# Altium PCB wifi_lamp_01.PcbDoc
Units mm, origin at the board's own origin, x right, y up, seen from the top; angles counter-clockwise.
Board outline 80 x 80 mm, 2 copper layers (Top Layer, Bottom Layer); 45 components, 34 nets, 135 pads, 11 vias.
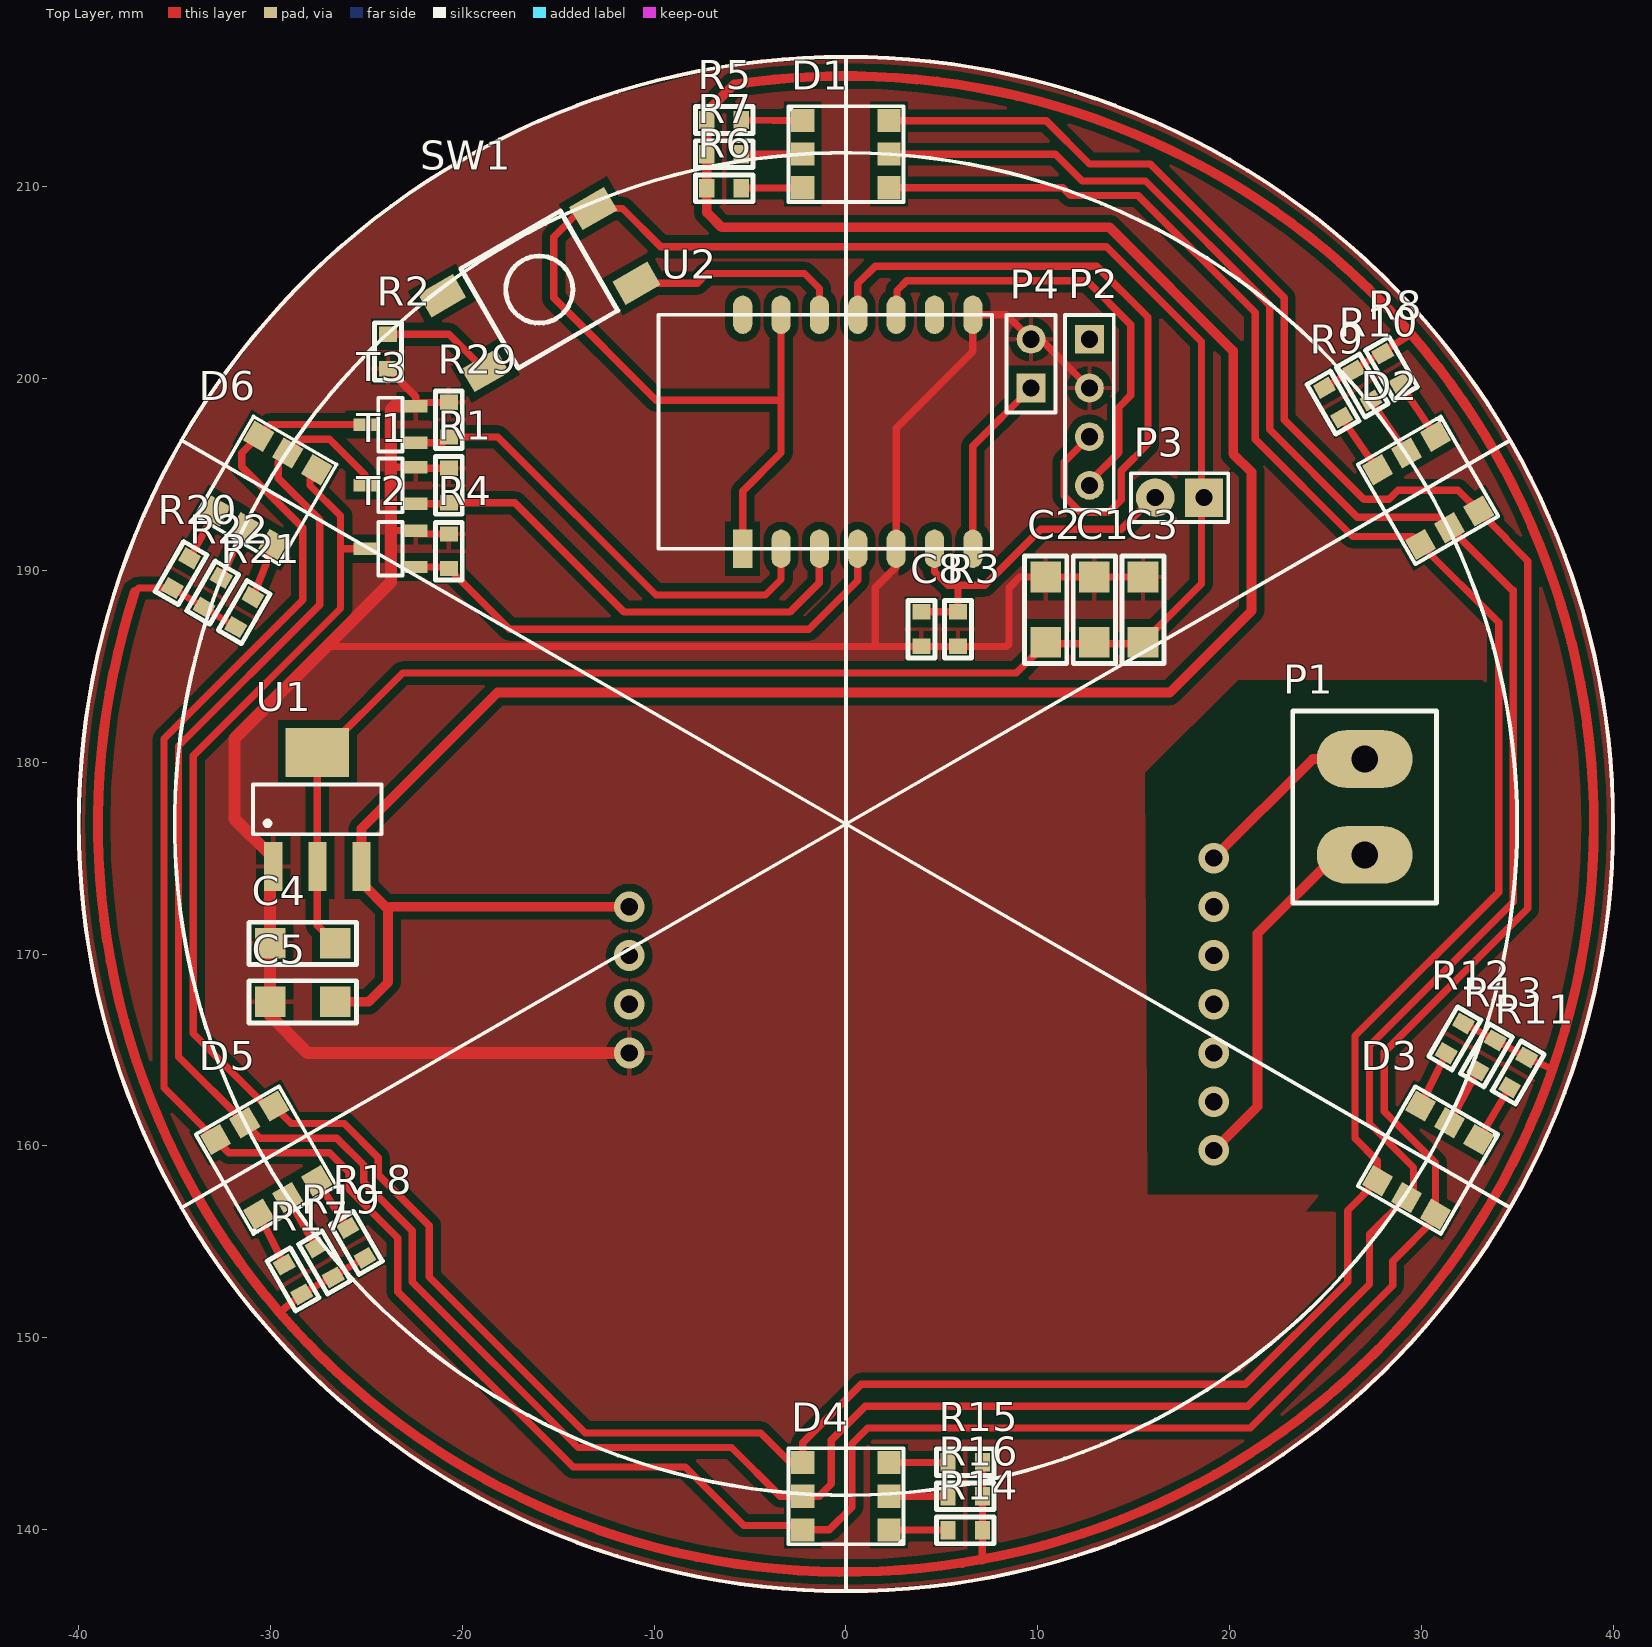
[diagram p0: Top Layer view]
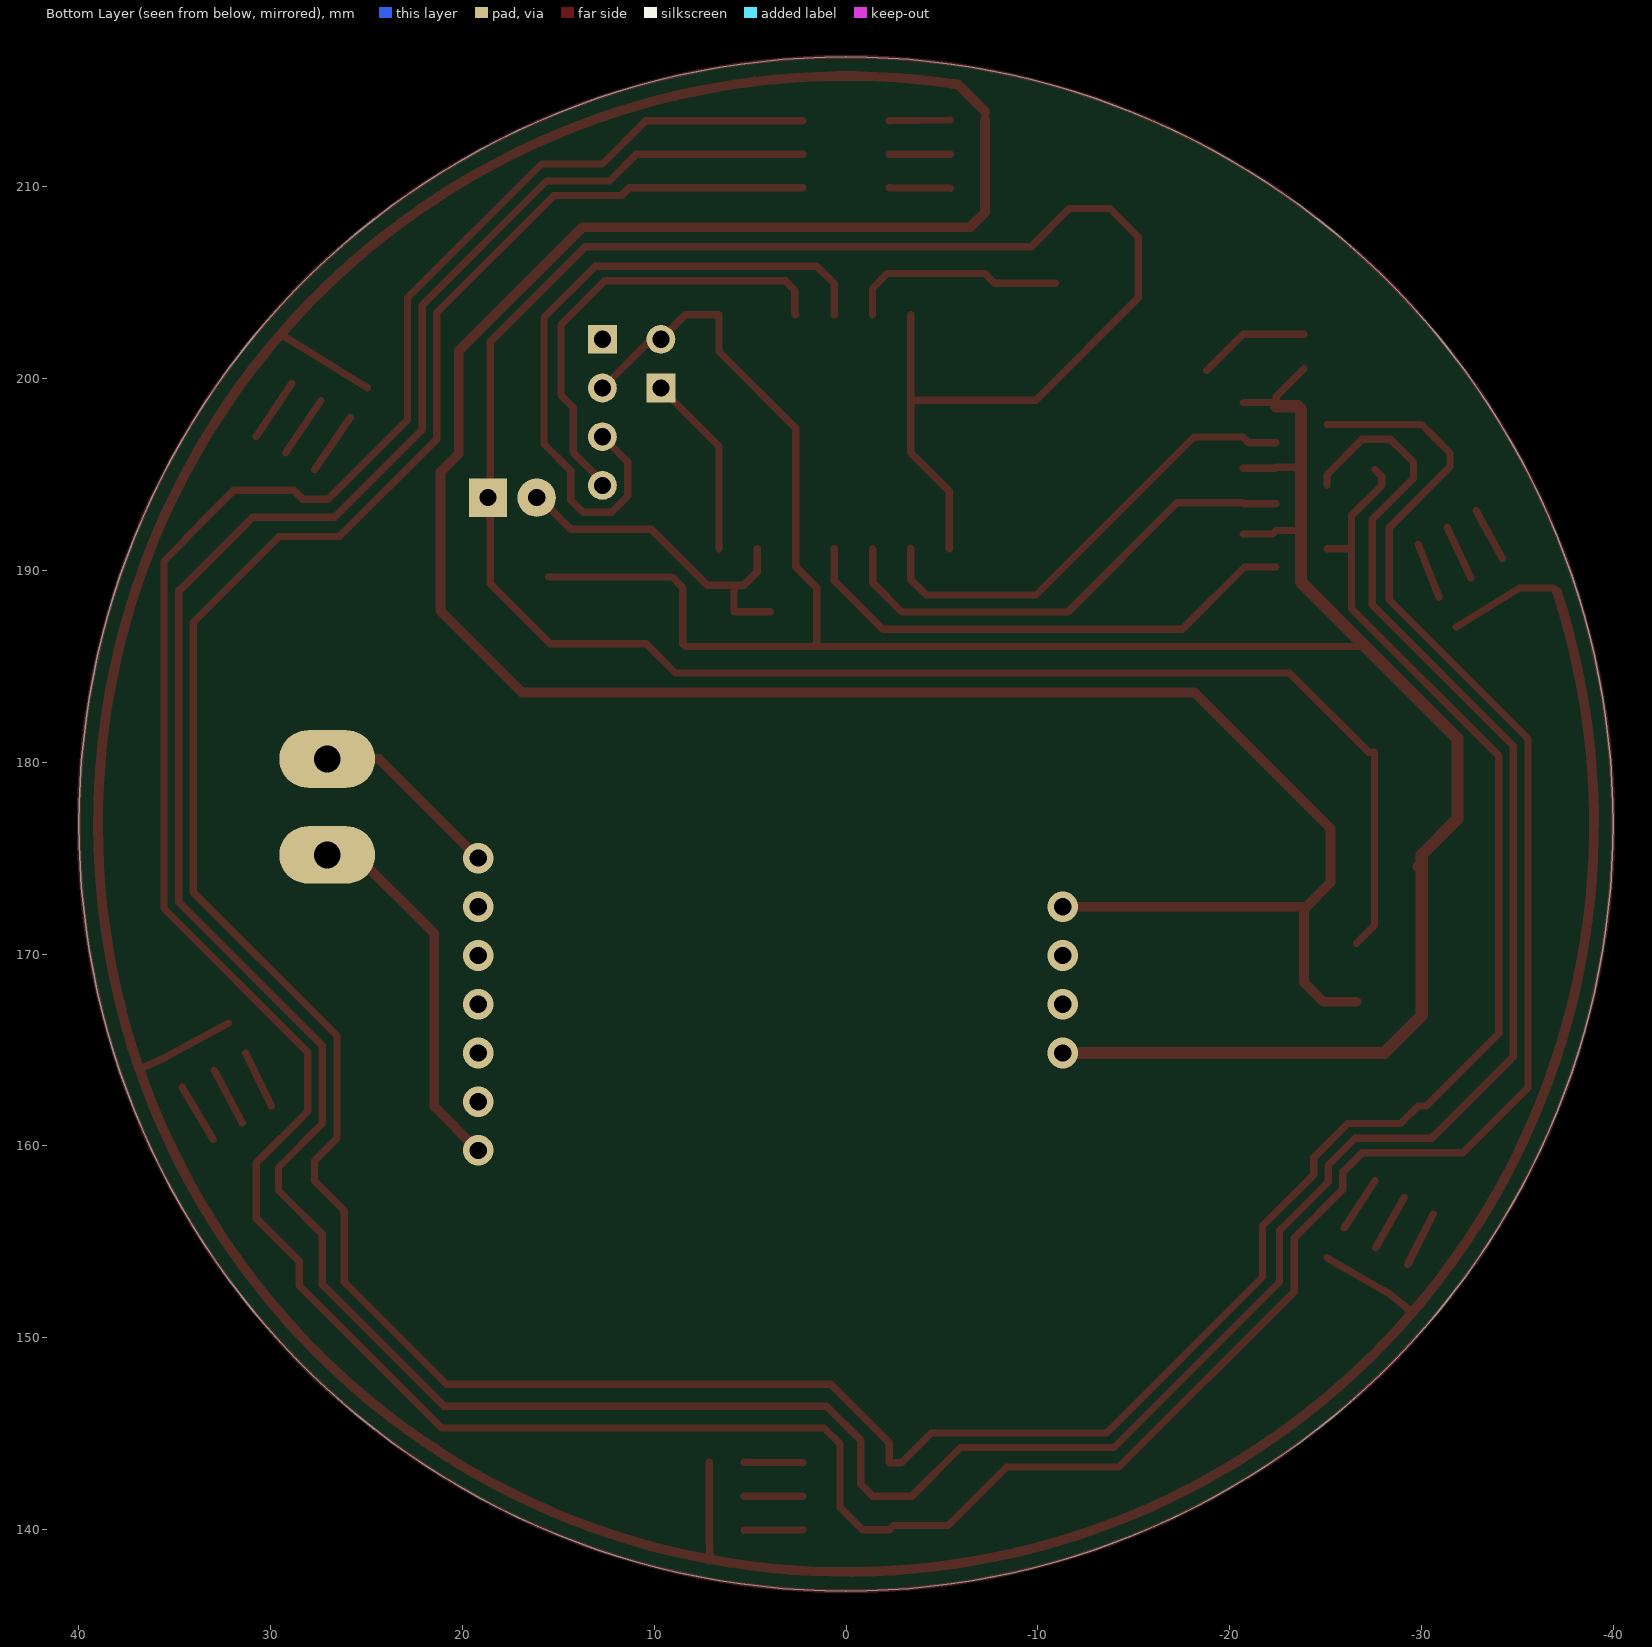
[diagram p1: Bottom Layer view, seen from below]
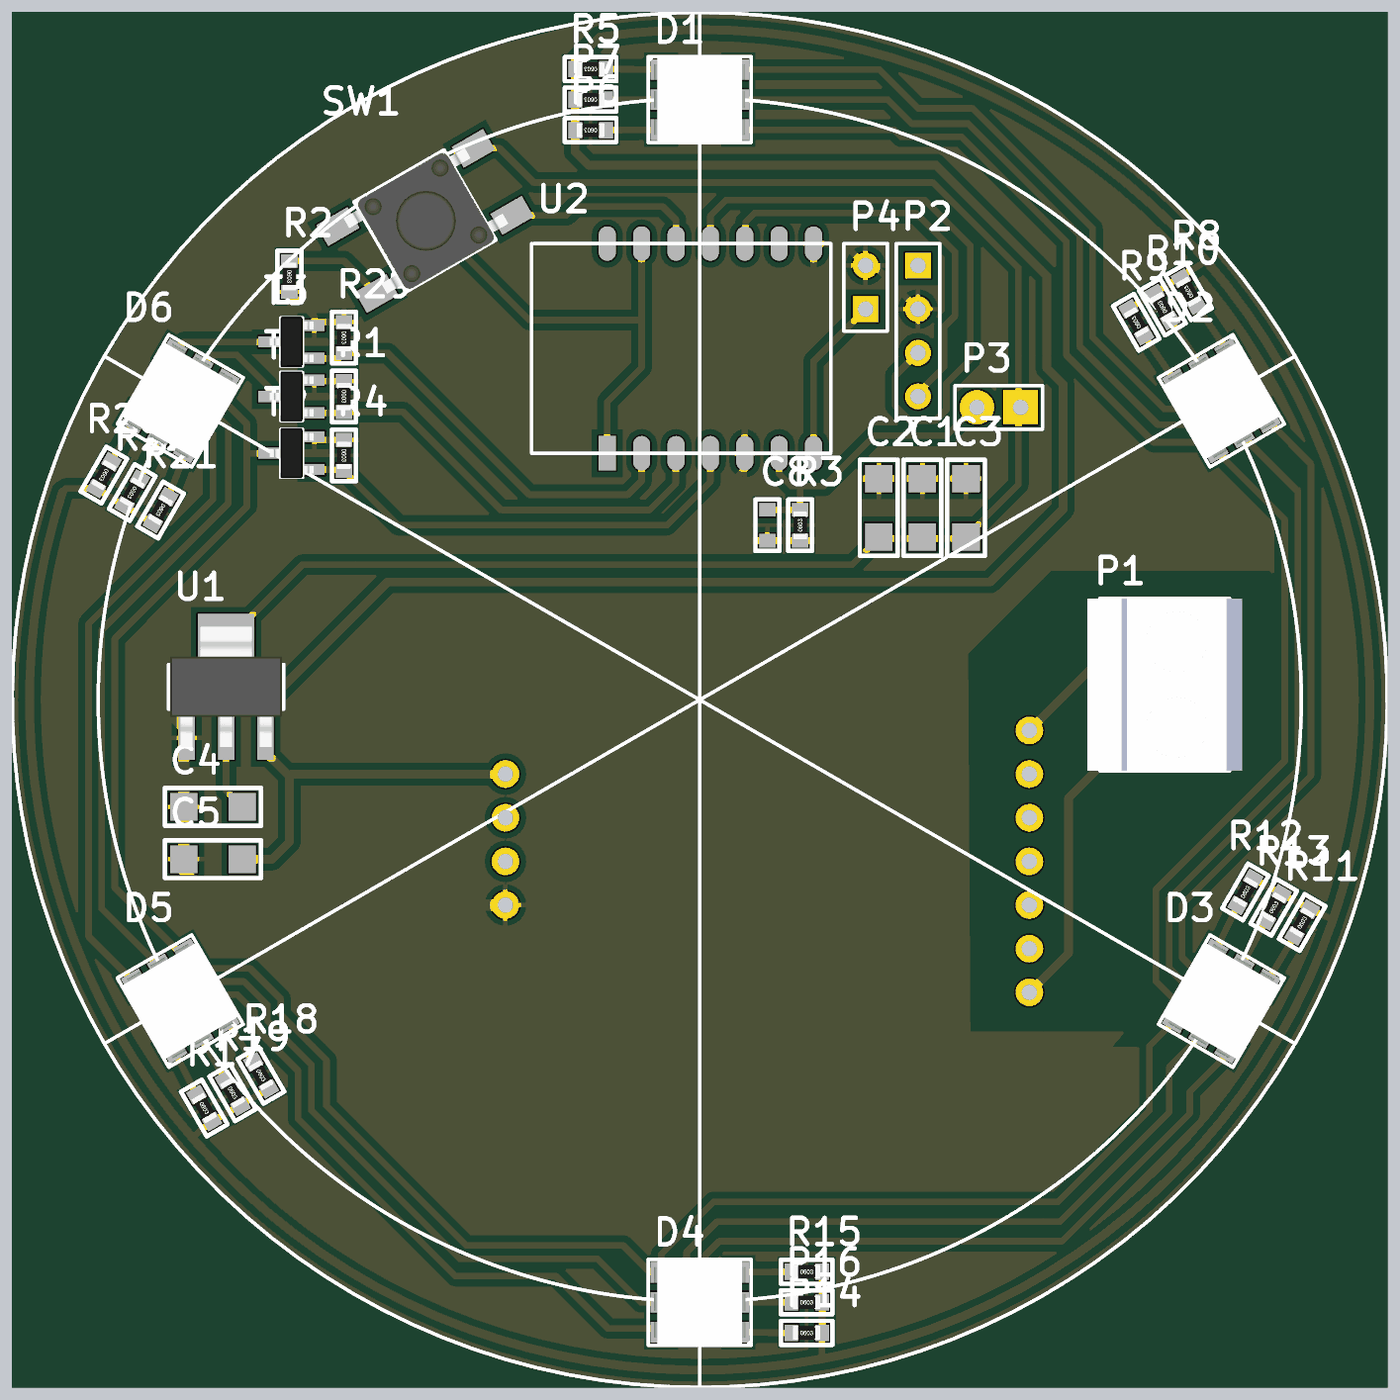
[diagram p2: 3D render of the assembled board from above, using the file's embedded part models]

## Layer stack, top to bottom
Top Layer: signal copper 0.0356
Dielectric: dielectric 0.32, FR-4, Dk 4.8
Bottom Layer: signal copper 0.0356

## Board outline
-34.641,156.784 ccw(c0,176.784) 0,136.784 ccw(c0,176.784) 34.641,156.784 ccw(c0,176.784) 34.641,196.784 ccw(c0,176.784) 0,216.784 ccw(c0,176.784) -34.641,196.784 ccw(c0,176.784)

## Design rules (kind name [scope] priority, off if disabled: settings)
Clearance Clearance_to_poly [All vs (InNamedPolygon('TOP GND'))] p1: gap=0.4
Clearance [All] p2: gap=0.381
PolygonConnect [All] p1: connectstyle=Relief reliefconductorwidth=0.254 reliefentries=4 polygonreliefangle="90 Angle"
RoutingVias [All] p1: holewidth=0.711 width=1.27 viastyle="Through Hole" minholewidth=0.711 minwidth=1.27 maxholewidth=0.711 maxwidth=1.27
SilkscreenOverComponentPads [All] p1: minsilkscreentomaskgap=0.254
SolderMaskExpansion [All] p1: expansion=0.102
Width [All] p1: maxlimit=0.762 minlimit=0.254 preferedwidth=0.254
27 further rules are at their usual default settings.

## Components (designator, comment, footprint, x,y, rotation, side; value= is the part's Value field where it differs from the comment)
C1 "10uF" FP_1206_CAP_085 12.954,187.96 r270 top
C2 "10uF" FP_1206_CAP_085 10.414,187.96 r270 top
C3 "10uF" FP_1206_CAP_085 15.494,187.96 r270 top
C4 "10uF" FP_1206_CAP_085 -28.321,170.561 r0 top
C5 "10uF" FP_1206_CAP_085 -28.321,167.513 r180 top
C8 "100nF" FP_0603_CAP_080 3.937,186.944 r270 top
D1 "RGB" RGB_LED_5.0x5.0mm 0,211.709 r270 top
D2 "RGB" RGB_LED_5.0x5.0mm 30.353,194.183 r210 top
D3 "RGB" RGB_LED_5.0x5.0mm 30.353,159.258 r150 top
D4 "RGB" RGB_LED_5.0x5.0mm 0,141.732 r90 top
D5 "RGB" RGB_LED_5.0x5.0mm -30.226,159.258 r30 top
D6 "RGB" RGB_LED_5.0x5.0mm -30.226,194.183 r330 top
P1 "AC" "Sorkapocs 2P 5mm" 27.051,177.673 r270 top
P2 "PROG" HDR1X4 12.7,202.057 r270 top
P3 "BUTTON" HDR1X2#1 18.669,193.802 r180 top
P4 "BUTTON" HDR1X2#2 9.652,199.517 r90 top
R1 "100K" FP_0603_RES -20.701,194.437 r270 top
R2 "100K" FP_0603_RES -23.876,201.422 r270 top
R3 "100K" FP_0603_RES 5.842,186.944 r90 top
R4 "100K" FP_0603_RES -20.701,191.008 r270 top
R5 "560R" FP_0603_RES -6.35,213.487 r180 top
R6 "560R" FP_0603_RES -6.35,209.931 r180 top
R7 "560R" FP_0603_RES -6.35,211.709 r180 top
R8 "560R" FP_0603_RES 28.448,200.533 r120 top
R9 "560R" FP_0603_RES 25.4,198.755 r120 top
R10 "560R" FP_0603_RES 26.924,199.644 r120 top
R11 "560R" FP_0603_RES 35.052,163.83 r60 top
R12 "560R" FP_0603_RES 31.75,165.608 r60 top
R13 "560R" FP_0603_RES 33.401,164.719 r60 top
R14 "560R" FP_0603_RES 6.223,139.954 r0 top
R15 "560R" FP_0603_RES 6.223,143.51 r0 top
R16 "560R" FP_0603_RES 6.223,141.732 r0 top
R17 "560R" FP_0603_RES -28.829,153.035 r300 top
R18 "560R" FP_0603_RES -25.527,154.94 r300 top
R19 "560R" FP_0603_RES -27.178,153.924 r300 top
R20 "560R" FP_0603_RES -34.671,189.865 r240 top
R21 "560R" FP_0603_RES -31.369,187.833 r240 top
R22 "560R" FP_0603_RES -33.02,188.849 r240 top
R29 "100K" FP_0603_RES -20.701,197.866 r270 top
SW1 "SW_ tactile" FP_TACTBTN -10.922,204.978 r300 top
T1 "SI2306" FET_SOT23 -23.749,194.437 r0 top
T2 "SI2306" FET_SOT23 -23.749,191.135 r0 top
T3 "SI2306" FET_SOT23 -23.749,197.612 r0 top
U1 "LD1117xx" SUPPLY_SOT223 -27.559,177.546 r90 top
U2 "ESP-3" ESP_3 7.62,191.135 r90 top

## Footprints (in the part's own frame and the unit in brackets; to place one, negate y for a bottom-side part, rotate by r counter-clockwise, add the part's x,y. Pads: shape width x height; smd on the part's side, far side on the other; paste and mask are expansions set on the pad)
ESP_3 [mm]
  rect 2x1 smd: 1(0,13)
  oval 2x1 smd: 2(0,11) 3(0,9) 4(0,7) 5(0,5) 6(0,3) 7(0,1) 8(12.2,1) 9(12.2,3) 10(12.2,5) 11(12.2,7) 12(12.2,9) 13(12.2,11) 14(12.2,13)
  silkscreen extent 0,0 12.2,17.4, body extent 0,0 12.2,17.4, height 2
FET_SOT23 [mm] "SOT23-3 tok"
  rect 1.2x0.65 smd: D(-1.327,0) G(1.327,-0.95) S(1.327,0.95)
  silkscreen extent -0.64,-1.4 0.64,1.4, body extent -1.27,-1.46 1.27,1.46, height 0.97
FP_0603_CAP_080 [mm] "0.8mm magas 0603 kapacitás"
  rect 0.8x0.95 smd: 1(-0.9,0) 2(0.9,0)
  silkscreen extent -1.5,-0.7 1.5,0.7, body extent -0.8,-0.4 0.76,0.4, height 0.8
FP_0603_RES [mm] "0603 ellenállás"
  rect 0.8x0.95 smd: 1(-0.9,0) 2(0.9,0)
  silkscreen extent -1.5,-0.7 1.5,0.7, body extent -0.8,-0.4 0.8,0.4, height 0.44
FP_1206_CAP_085 [mm] "1206 kapacitás 0.85 mm"
  rect 1.6x1.6 smd: 1(-1.7,0) 2(1.7,0)
  silkscreen extent -2.8,-1.1 2.8,1.1, body extent -1.52,-0.79 1.58,0.79, height 0.85
FP_TACTBTN [mm] "TE CONNECTIVITY / ALCOSWITCH - FSM2JSMA"
  rect 1.4x2.1 smd: 1(0,0) 2(0,-9.1) 3(-4.5,0) 4(-4.5,-9.1)
  silkscreen extent -5.25,-7.55 0.75,-1.55, body extent -5.23,-8.57 0.77,-0.42, height 5
HDR1X2#1 [mm] "Connector; Header; 2 Position"
  rect 2x2 hole 0.9: 1(0,0)
  round 2 hole 0.9: 2(2.54,0)
  silkscreen extent -1.27,-1.27 3.81,1.27
HDR1X2#2 [mm] "Connector; Header; 2 Position"
  rect 1.5x1.5 hole 0.9: 1(0,0)
  round 1.5 hole 0.9: 2(2.54,0)
  silkscreen extent -1.27,-1.27 3.81,1.27
HDR1X4 [mm] "Connector; Header; 4 Position"
  rect 1.5x1.5 hole 0.9: 1(0,0)
  round 1.5 hole 0.9: 2(2.54,0) 3(5.08,0) 4(7.62,0)
  silkscreen extent -1.27,-1.27 8.89,1.27
RGB_LED_5.0x5.0mm [mm]
  rect 1.2x1.2 smd: AB(-1.75,-2.25) AG(1.75,-2.25) AR(0,-2.25) KB(-1.75,2.25) KG(1.75,2.25) KR(0,2.25)
  silkscreen extent -2.5,-3 2.5,3, body extent -2.48,-2.68 2.47,2.67, height 1.7
"Sorkapocs 2P 5mm" [mm]
  oval 3x5 hole 1.4: 1(-2.5,0) 2(2.5,0)
  silkscreen extent -5,-3.75 5,3.75, body extent -5,-4.5 5,4.5, height 15.2
SUPPLY_SOT223 [mm] "SOT223 package, 3 leads"
  rect 2.55x0.95 smd: 1(-2.975,2.3) 2(-2.975,0) 3(-2.975,-2.3)
  rect 2.55x3.3 smd: 2(2.975,0)
  silkscreen extent -1.3,-3.35 1.3,3.35, body extent -3.5,-3.25 3.5,3.25, height 1.65

## Part data
C1 C2 C3 C4 C5 C8: library part Cap, "Capacitor"
D1 D2 D3 D4 D5 D6: library part LED_RGB_6_PIN, "LED_RGB_6_PIN"
P1 P3 P4: library part "Header 2", "Header, 2-Pin"
P2: library part "Header 4", "Header, 4-Pin"
R1 R2 R3 R4 R29: library part RES, "Resistor"
R5 R6 R7 R8 R9 R10 R11 R12 R13 R14 R15 R16 R17 R18 R19 R20 R21 R22: library part Res3, "Resistor"
T1 T2 T3: library part NMOS
U1: "LD1117xx 3,3V lin reg"
U2: "ESP-3wifi module"

## Via types
v1: diameter 1.6, hole 0.9, Top Layer to Bottom Layer, 11 vias

## Nets (pads, with @x,y where several pads share a name; then routed paths per layer and width w, separated by ;. In a path a pad name is that pad's centre, name@x,y a point inside that pad or via, vN(x,y) a via of type N, cw(c..) or ccw(c..) an arc to the next point about the centre after c; other vN are vias at no path point)
3V3: C1.2 C2.2 C3.2 C4.2 P3.1 SW1.3 SW1.4 U1.2 U2.1 U2.13 | length 140.4
  Top Layer w0.381: C4.2 -27.559,171.499 -27.559,174.571 -27.559,180.521 -27.251,180.521 -23.114,184.658 8.89,184.658 10.414,186.182 15.416,186.182 C3.2 18.542,189.308 P3.1@18.542,193.675 ; U2.1 -5.38,194.137 -3.38,196.137 -3.38,198.882 ; U2.13 -3.38,198.882 ; P3.1 P3.1@18.542,193.675 ; -3.38,198.882 -9.906,198.882 -15.24,204.216 -15.24,207.391 -13.756,208.875 SW1.3 -11.644,208.875 -9.652,206.883 13.589,206.883 18.542,201.93 P3.1@18.542,193.675
5V: C5.1 R5.2 R6.2 R7.2 R8.2 R9.2 R10.2 R11.2 R12.2 R13.2 R14.2 R15.2 R16.2 R17.2 R18.2 R19.2 R20.2 R21.2 R22.2 U1.3 | length 355.9
  Top Layer w0.381: -37.074,188.887 -36.876,189.086 R20.2 R22.2 R21.2 ; -29.539,151.319 R17.2 -26.755,153.192 R18.2 ; R5.2 R5.2@-7.25,213.924 ; 7.111,138.438 R14.2 R16.2 R15.2 ; R9.2 26.452,200.459 27.954,201.384 29.476,202.321 ; R12.2 R13.2 R11.2 36.844,163.996
  Top Layer w0.508: -37.074,188.887 ccw(c0,176.784) -29.539,151.319 ccw(c0,176.784) 7.111,138.438 ccw(c0,176.784) 36.844,163.996 ccw(c0,176.784) 29.476,202.321 ; C5.1 -24.892,167.513 -23.876,168.529 -23.876,172.339 ; v1(-11.303,172.466) -23.749,172.466 -23.876,172.339 ; R5.2 R7.2 R6.2 -7.25,208.672 -6.477,207.899 13.74,207.899 20.193,201.446 20.193,196.088 21.145,195.135 21.145,187.897 16.891,183.642 -18.161,183.642 -25.259,176.544 U1.3 -25.259,173.722 -23.876,172.339 ; R5.2@-7.25,213.924 -5.828,215.346 cw(c0,176.784) 29.476,202.321
"AC ~": P1.1 | length 10
  Top Layer w0.508: v1(19.177,175.006) 24.344,180.173 P1.1
"AC ~~": P1.2 | length 19.5
  Top Layer w0.508: v1(19.177,159.766) 21.463,162.052 21.463,171.069 25.567,175.173 P1.2
BLUE: R29.2 T3.G U2.2 | length 24.5
  Top Layer w0.381: T3.G -21.005,196.662 R29.2 -18.15,196.966 -9.906,188.722 -4.191,188.722 -3.38,189.533 U2.2
BOOT: P4.1 U2.7 | length 9.6
  Top Layer w0.381: U2.7 6.62,196.485 P4.1
BTN: C8.1 P3.2 R3.2 U2.6 | length 18.1
  Top Layer w0.381: C8.1 R3.2 5.842,189.103 5.715,189.23 ; U2.6 4.62,189.944 5.334,189.23 5.715,189.23 ; P3.2@16.002,193.802 14.351,192.151 10.16,192.151 7.239,189.23 5.715,189.23
GND: C1.1 C2.1 C3.1 C4.1 C5.2 C8.2 P2.2 P4.2 R1.1 R2.2 R3.1 R4.1 R29.1 T1.S T2.S T3.S U1.1 U2.5 U2.8 | length 394
  Top Layer w0.2: 40,176.784 ccw(c0,176.784) 40,176.784
  Top Layer w0.381: -31.877,181.102 -29.845,183.134 ; -27.075,186.044 1.524,186.044 ; R2.2 -22.422,199.068 T3.S ; -23.721,195.387 T1.S -22.372,195.337 R1.1 ; -23.622,192.085 T2.S -22.245,191.908 R4.1 ; T3.S@-22.225,198.759 -22.218,198.766 R29.1 ; P2.2 10.16,202.057 P4.2 8.374,203.335 U2.8 6.62,201.422 2.62,197.422 U2.5 2.62,190.199 1.524,189.103 1.524,186.044 ; C3.1 C1.1 C2.1 9.066,189.66 8.509,189.103 8.509,186.182 8.371,186.044 R3.1 C8.2 1.524,186.044
  Top Layer w0.635: U1.1 U1.1@-30.021,174.409 ; T3.S -23.561,198.562 -23.721,198.402 -23.721,195.387 -23.721,189.398 -27.075,186.044 -31.877,181.242 -31.877,181.102 -31.877,177.038 -30.021,175.182 U1.1@-30.021,174.409 ; v1(-11.303,164.846) -28.067,164.846 -30.021,166.8 C5.2 U1.1@-30.021,174.409
GREEN: R4.2 T2.G U2.4 | length 27.1
  Top Layer w0.381: T2.G -20.778,190.185 R4.2 -17.537,186.944 -1.92,186.944 0.62,189.484 U2.4
NetD1_AB: D1.AB R5.1 | length 3.2
  Top Layer w0.381: R5.1 D1.AB
NetD1_AG: D1.AG R6.1 | length 3.2
  Top Layer w0.381: R6.1 D1.AG
NetD1_AR: D1.AR R7.1 | length 3.2
  Top Layer w0.381: R7.1 D1.AR
NetD2_AB: D2.AB R8.1 | length 3.3
  Top Layer w0.381: R8.1 D2.AB
NetD2_AG: D2.AG R9.1 | length 3.3
  Top Layer w0.381: R9.1 D2.AG
NetD2_AR: D2.AR R10.1 | length 3.3
  Top Layer w0.381: R10.1 D2.AR
NetD3_AB: D3.AB R11.1 | length 3.2
  Top Layer w0.381: D3.AB R11.1
NetD3_AG: D3.AG R12.1 | length 3.1
  Top Layer w0.381: D3.AG R12.1
NetD3_AR: D3.AR R13.1 | length 3.1
  Top Layer w0.381: D3.AR R13.1
NetD4_AB: D4.AB R14.1 | length 3.1
  Top Layer w0.381: D4.AB R14.1
NetD4_AG: D4.AG R15.1 | length 3.1
  Top Layer w0.381: D4.AG R15.1
NetD4_AR: D4.AR R16.1 | length 3.1
  Top Layer w0.381: D4.AR R16.1
NetD5_AB: D5.AB R17.1 | length 2.9
  Top Layer w0.381: D5.AB R17.1
NetD5_AG: D5.AG R18.1 | length 2.9
  Top Layer w0.381: D5.AG R18.1
NetD5_AR: D5.AR R19.1 | length 3
  Top Layer w0.381: D5.AR R19.1
NetD6_AB: D6.AB R20.1 | length 2.8
  Top Layer w0.381: R20.1 D6.AB
NetD6_AG: D6.AG R21.1 | length 3
  Top Layer w0.381: R21.1 D6.AG
NetD6_AR: D6.AR R22.1 | length 2.9
  Top Layer w0.381: R22.1 D6.AR
PAIR: R2.1 SW1.1 SW1.2 U2.12 | length 17.3
  Top Layer w0.381: R2.1 -20.697,202.322 SW1.2 ; SW1.1 -7.747,204.978 -7.239,205.486 -2.159,205.486 -1.38,204.707 U2.12
PWM_B: D1.KB D2.KB D3.KB D4.KB D5.KB D6.KB T3.D | length 217.3
  Top Layer w0.381: T3.D -30.011,197.612 D6.KB -31.496,196.127 -31.496,195.409 -28.321,192.234 -28.321,188.468 -35.56,181.229 -35.56,163.025 D5.KB -32.174,159.639 -26.924,159.639 -25.908,158.623 -25.908,157.734 -23.368,155.194 -23.368,152.4 -14.224,143.256 -8.382,143.256 -5.334,140.208 -2.476,140.208 D4.KB -0.861,139.982 0.318,141.16 0.318,144.463 1.143,145.288 21.082,145.288 28.511,152.718 28.511,153.987 30.744,156.22 D3.KB 30.744,159.121 28.067,161.798 28.067,164.89 35.56,172.383 35.56,190.5 34.417,191.643 34.417,191.686 D2.KB 31.92,194.183 28.787,194.183 28.321,193.717 27.009,193.717 22.86,197.866 22.86,204.216 15.875,211.201 12.7,211.201 10.442,213.459 D1.KB
PWM_G: D1.KG D2.KG D3.KG D4.KG D5.KG D6.KG T2.D | length 194.4
  Top Layer w0.381: D6.KG -27.94,194.902 -27.94,194.437 -26.352,192.85 -26.352,191.135 ; T2.D -26.352,191.135 ; D1.KG 11.303,209.959 11.712,209.55 15.24,209.55 21.336,203.454 21.336,196.85 26.416,191.77 29.552,191.77 D2.KG 34.036,187.286 34.036,173.228 26.543,165.735 26.543,160.401 27.712,159.232 D3.KG 26.162,156.634 26.162,152.908 20.828,147.574 0.798,147.574 -2.25,144.526 D4.KG -2.893,143.482 -4.445,145.034 -13.589,145.034 -21.717,153.162 -21.717,155.829 -24.384,158.496 -24.384,159.385 -26.162,161.163 -28.917,161.163 D5.KG -30.256,162.082 -34.036,165.862 -34.036,180.34 -26.352,188.023 -26.352,191.135
PWM_R: D1.KR D2.KR D3.KR D4.KR D5.KR D6.KR T1.D | length 207.8
  Top Layer w0.381: T1.D -25.076,195.002 -26.924,196.85 -28.383,196.85 D6.KR -29.591,195.642 -29.591,194.818 -27.432,192.659 -27.432,188.214 -34.798,180.848 -34.798,164.654 D5.KR -30.545,160.401 -26.543,160.401 -25.146,159.004 -25.146,158.115 -22.606,155.575 -22.606,152.908 -13.97,144.272 -5.969,144.272 -3.429,141.732 D4.KR -1.397,141.732 -0.762,142.367 -0.762,144.653 1.016,146.431 20.955,146.431 27.305,152.781 27.305,155.386 D3.KR 29.591,157.672 29.591,158.877 27.305,161.163 27.305,165.227 34.798,172.72 34.798,188.976 34.736,188.976 D2.KR 30.926,192.786 26.67,192.786 22.098,197.358 22.098,203.835 15.621,210.312 12.328,210.312 10.931,211.709 D1.KR
RED: R1.2 T1.G U2.3 | length 25.8
  Top Layer w0.381: T1.G -20.751,193.487 R1.2 -17.261,193.537 -11.557,187.833 -2.921,187.833 -1.397,189.357 -1.397,191.118 U2.3
RX: P2.3 U2.11 | length 35.6
  Top Layer w0.381: U2.11 0.62,204.963 1.524,205.867 13.081,205.867 15.748,203.2 15.748,196.596 14.351,195.199 14.351,193.675 13.716,193.04 12.228,193.04 11.378,193.89 11.378,195.655 P2.3
TX: P2.4 U2.10 | length 23.9
  Top Layer w0.381: U2.10 2.667,203.382 2.667,204.597 3.175,205.105 12.573,205.105 14.859,202.819 14.859,199.136 14.224,198.501 14.224,196.15 12.7,194.626 P2.4
pads on no net: P2.1 U2.9 U2.14
copper on no net:
  other v1: 19.177,162.306 19.177,164.846 -11.303,167.386 19.177,167.386 -11.303,169.926 19.177,169.926 19.177,172.466

## Polygon pours and split planes (outlines as drawn)
GND on Top Layer "TOP GND" (solid, pour order 4): -26.543,206.756 -20.447,211.201 -16.891,212.979 -13.335,214.503 -5.715,216.408 2.032,216.789 8.382,215.9 15.367,213.741 20.701,211.074 26.289,207.01 29.972,203.327 32.639,199.898 33.909,197.993 35.179,195.834 37.211,191.516 38.608,187.071 39.624,182.753 40.005,178.435 39.751,173.101 39.116,168.275 37.719,163.576 35.941,159.258 33.782,155.321 31.115,151.638 28.575,148.717 25.654,146.05 20.828,142.621 17.78,140.97 14.478,139.446 7.239,137.414 0.127,136.779 -5.588,137.16 -11.811,138.557 -17.653,140.843 -23.495,144.399 -28.829,148.971 -33.274,154.559 -35.814,159.131 -37.592,163.068 -39.243,169.164 -39.878,174.752 -39.751,180.848 -39.116,185.039 -37.846,189.484 -35.941,194.31 -33.147,199.009 -30.099,203.073

## Other copper
Top Layer:
  pour cut-out: 33.34,184.12 33.183,184.277 20.447,184.277 15.621,179.451 15.748,157.48 24.765,157.48 24.003,156.591 25.466,156.591 25.781,156.972 26.289,157.48 26.93,159.029 25.94,160.053 25.87,165.915 26.67,166.878 33.34,173.516

## Silkscreen, mask and mechanical layers (free items; w line width, h text height)
Top Overlay:
  circle w0.2: c0,176.784 r35
  lines w0.2: 0,216.789 0,136.784 ; -34.641,156.784 cw(c0,176.784) -34.641,196.784 ; -34.641,156.784 ccw(c0,176.784) 0,136.784 ; -34.641,156.784 0,176.787 ; -34.641,196.784 cw(c0,176.784) 0,216.784 cw(c0,176.784) 34.641,196.784 ; -34.641,196.784 0,176.787 ; 0,136.784 ccw(c0,176.784) 34.641,156.784 ; 0,176.787 34.641,156.784 ; 0,176.787 34.641,196.784 ; 34.641,156.784 ccw(c0,176.784) 34.641,196.784